# Altium PCB led.PcbDoc
Units mm, origin at the board's own origin, x right, y up, seen from the top; angles counter-clockwise.
Board outline 20 x 20 mm, 2 copper layers (Top Layer, Bottom Layer), stack 1.671 mm thick; 5 components, 4 nets, 10 pads, 1 vias.
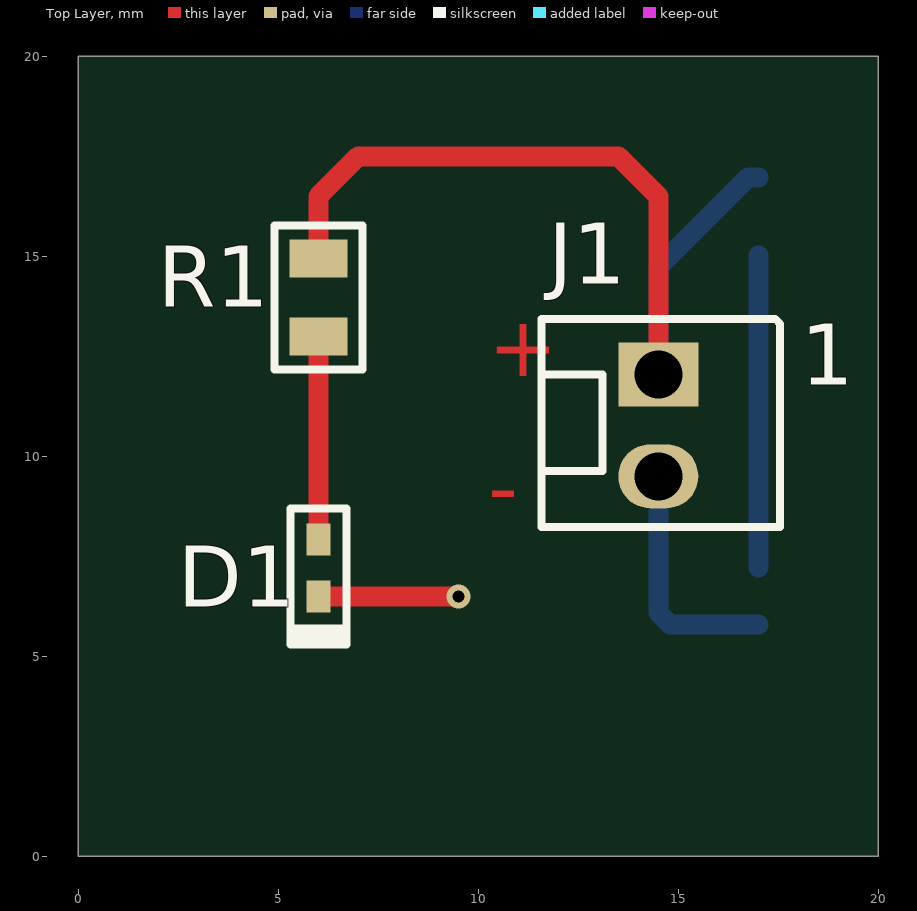
[diagram p0: Top Layer view]
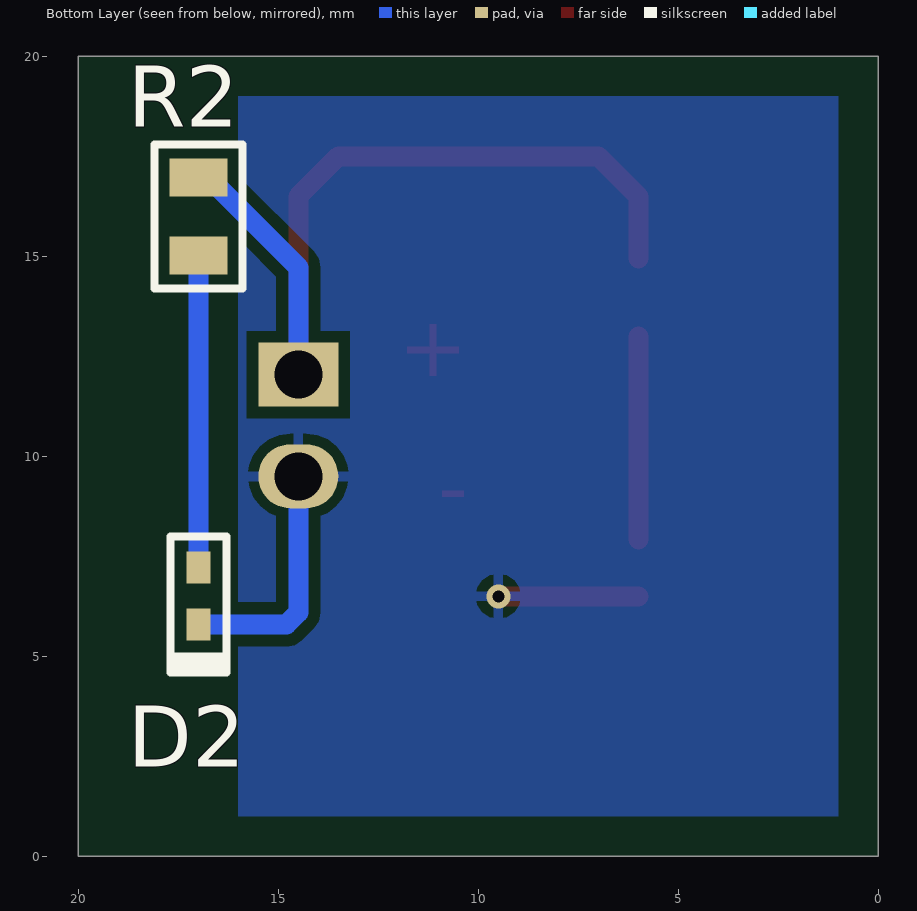
[diagram p1: Bottom Layer view, seen from below]
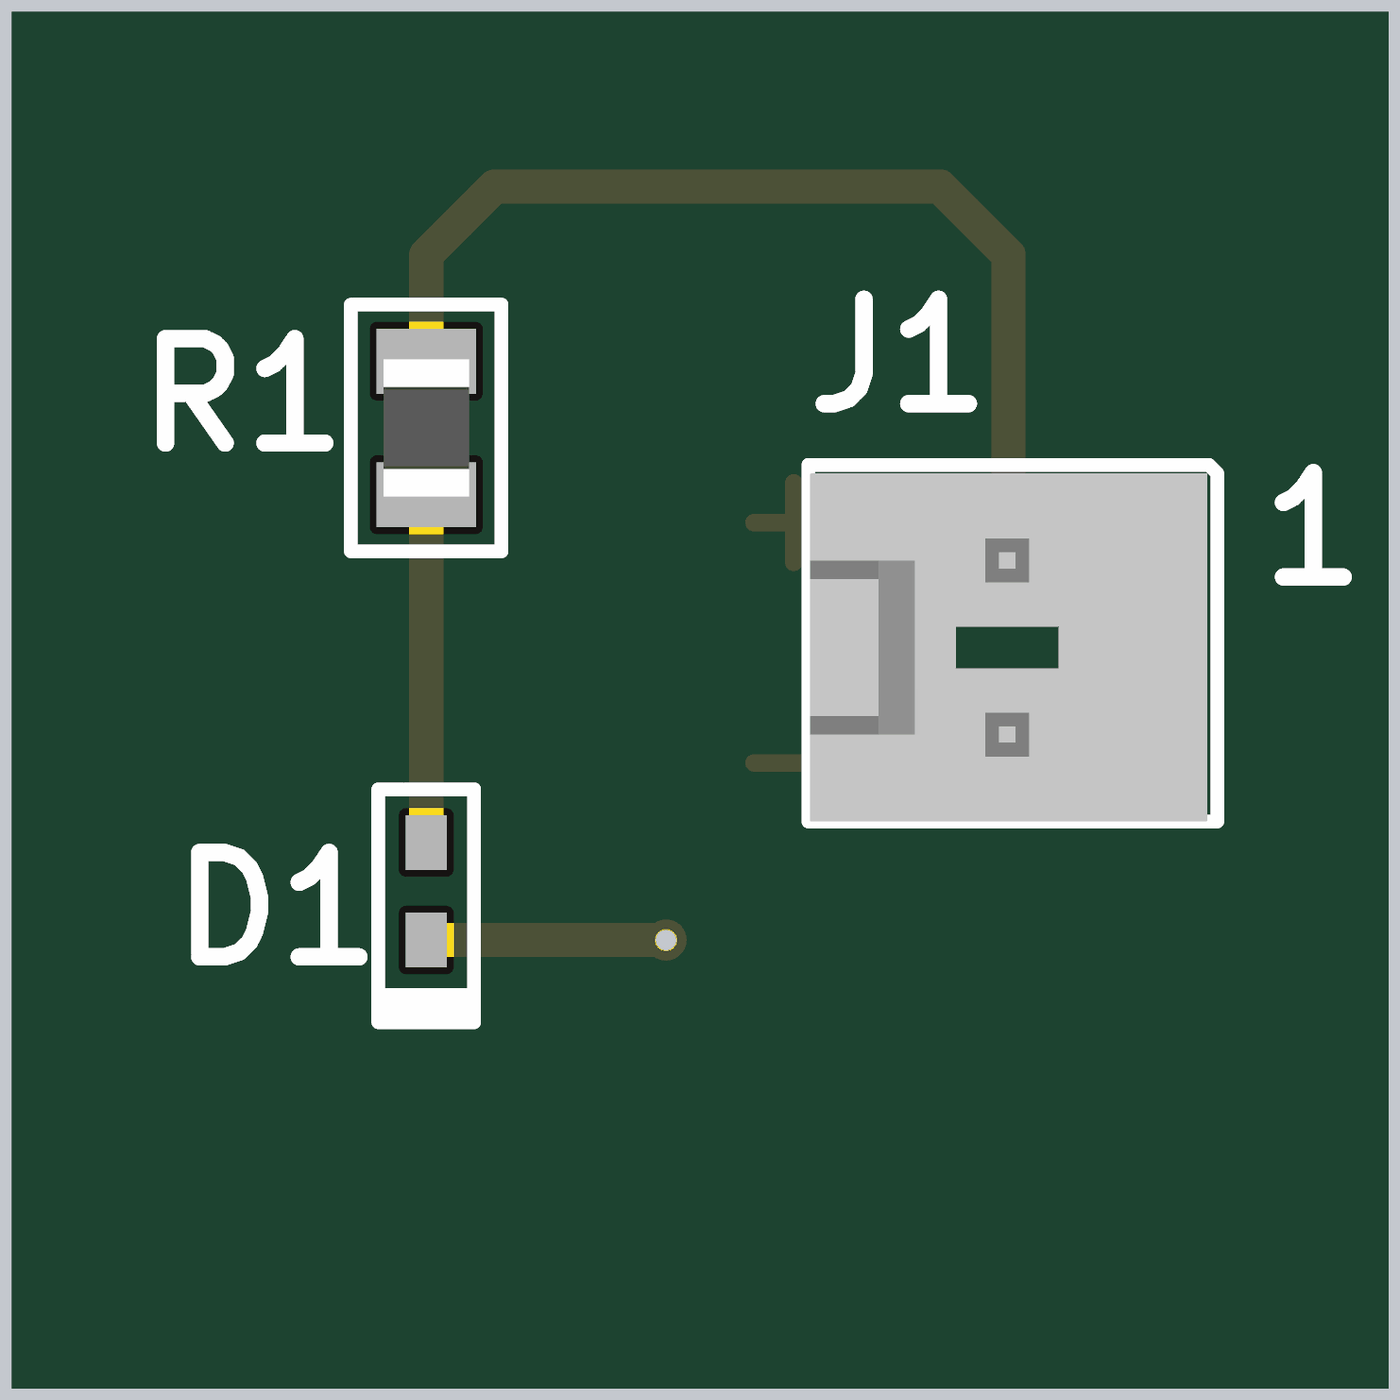
[diagram p2: 3D render of the assembled board from above, using the file's embedded part models]

## Layer stack, top to bottom
Top Solder: solder mask 0.0102, Solder Resist, Dk 3.5
Top Layer: signal copper 0.0356
Dielectric 1: dielectric 1.6, FR-4, Dk 4.8
Bottom Layer: signal copper 0.0356
Bottom Solder: solder mask 0.0102, Solder Resist, Dk 3.5

## Board outline
0,0 20,0 20,20 0,20

## Design rules (kind name [scope] priority, off if disabled: settings)
Clearance [All] p1: gap=0.3 ignorepadtopadclearanceinfootprint=FALSE
PolygonConnect [All] p1: connectstyle=Relief reliefconductorwidth=0.254 reliefentries=4 polygonreliefangle="90 Angle" airgapwidth=0.254
RoutingVias [All] p1: holewidth=0.3 width=0.6 viastyle="Through Hole" minholewidth=0.3 minwidth=0.6 maxholewidth=0.3 maxwidth=0.6
SilkToSolderMaskClearance [IsPad] p1: minsilkscreentomaskgap=0.1 clearancetoexposedcopper=TRUE
SolderMaskExpansion [All] p1: expansion=0.102 istentingtop=FALSE
Width [All] p1: maxlimit=1 minlimit=0.3 preferedwidth=0.5
29 further rules are at their usual default settings.

## Components (designator, comment, footprint, x,y, rotation, side; value= is the part's Value field where it differs from the comment)
D1 "Green" LED0603G 6,7.2 r90 top
D2 "Green" LED0603G 17,6.5 r90 bottom
J1 "1x2 Header" "HEADER 1X2" 14.5,12.04 r0 top
R1 "360R" RESISTOR 6,13.975 r90 top
R2 "360R" RESISTOR 17,16 r90 bottom

## Footprints (in the part's own frame and the unit in brackets; to place one, negate y for a bottom-side part, rotate by r counter-clockwise, add the part's x,y. Pads: shape width x height; smd on the part's side, far side on the other; paste and mask are expansions set on the pad)
"HEADER 1X2" [mm]
  rect 2x1.6 hole 1.2: 1(0,0)
  oval 2x1.6 hole 1.2: 2(0,-2.54)
  silkscreen extent -2.92,-3.81 3.05,1.4, body extent -2.9,-3.81 2.9,1.27, height 11.71
LED0603G [mm]
  rect 0.8x0.6 smd: 1(-0.7,0) 2(0.725,0)
  silkscreen extent -1.9,-0.7 1.5,0.7, body extent -0.81,-0.4 0.81,0.4, height 1.11
RESISTOR [mm]
  rect 0.95x1.45 smd: 1(-0.975,0) 2(0.975,0)
  silkscreen extent -1.8,-1.1 1.8,1.1, body extent -1,-0.62 1,0.62, height 0.61

## Part data
D1 D2: library part TLMG1100-GS08, "Standard LEDs - SMD Green Non-Diffused", Case Code (Imperial)=0603, Case Code (Metric)=1608, Forward Current=20mA, Forward Voltage=2.1V, Manufacturer="Vishay Semiconductors", Max Operating Temperature=100°C, Max Power Dissipation=90mW, Min Operating Temperature=-40°C, Package Quantity=1, Reverse Voltage=6V, Supplier Part Number 1=751-1165-1-ND, Voltage Rating (DC)=3V, Case/Package=0603, Category=Optoelectronics, Color=Green, ComponentLink1Description=https://datasheet.ciiva.com/11773/0900766b80ed1fab-11773829.pdf?src-supplier=RSComponents, ComponentLink1URL=https://datasheet.ciiva.com/11773/0900766b80ed1fab-11773829.pdf?src-supplier=RSComponents, ComponentLink2Description=https://datasheet.ciiva.com/15118/getdatasheetpartid-196748-15118054.pdf?src-supplier=Verical, ComponentLink2URL=https://datasheet.ciiva.com/15118/getdatasheetpartid-196748-15118054.pdf?src-supplier=Verical, ComponentLink3Description=https://datasheet.ciiva.com/2109/tlmb1100-2109920.pdf?src-supplier=Digi-Key, ComponentLink3URL=https://datasheet.ciiva.com/2109/tlmb1100-2109920.pdf?src-supplier=Digi-Key, ComponentLink4Description=https://datasheet.ciiva.com/16299/tlmb1100-16299239.pdf?src-supplier=Future+Electronics, ComponentLink4URL=https://datasheet.ciiva.com/16299/tlmb1100-16299239.pdf?src-supplier=Future+Electronics, ComponentLink5Description=https://datasheet.ciiva.com/2109/tlmb1100-2109919.pdf?src-supplier=Digi-Key, ComponentLink5URL=https://datasheet.ciiva.com/2109/tlmb1100-2109919.pdf?src-supplier=Digi-Key, ComponentLink6Description=https://datasheet.ciiva.com/5798/485053-5798326.pdf?src-supplier=Farnell, ComponentLink6URL=https://datasheet.ciiva.com/5798/485053-5798326.pdf?src-supplier=Farnell, ComponentLink7Description=https://datasheet.ciiva.com/3166/tlmb1100-3166935.pdf?src-supplier=Avnet, ComponentLink7URL=https://datasheet.ciiva.com/3166/tlmb1100-3166935.pdf?src-supplier=Avnet, ComponentLink8Description=https://datasheet.ciiva.com/3166/tlmb1100-3166505.pdf?src-supplier=Avnet, ComponentLink8URL=https://datasheet.ciiva.com/3166/tlmb1100-3166505.pdf?src-supplier=Avnet, ComponentLink9Description=https://datasheet.ciiva.com/22655/1911389-22655641.pdf?src-supplier=Element14, ComponentLink9URL=https://datasheet.ciiva.com/22655/1911389-22655641.pdf?src-supplier=Element14, ComponentLink10Description=https://datasheet.ciiva.com/2109/tlmb1100-2109921.pdf?src-supplier=Digi-Key, ComponentLink10URL=https://datasheet.ciiva.com/2109/tlmb1100-2109921.pdf?src-supplier=Digi-Key, ComponentLink11Description=https://datasheet.ciiva.com/22655/1911389-22655622.pdf?src-supplier=Element14, ComponentLink11URL=https://datasheet.ciiva.com/22655/1911389-22655622.pdf?src-supplier=Element14, ComponentLink12Description=https://datasheet.ciiva.com/5798/tlmb1100-5798250.pdf?src-supplier=Farnell, ComponentLink12URL=https://datasheet.ciiva.com/5798/tlmb1100-5798250.pdf?src-supplier=Farnell, ComponentLink13Description=https://datasheet.ciiva.com/8027/485053-8027918.pdf?src-supplier=Element14, ComponentLink13URL=https://datasheet.ciiva.com/8027/485053-8027918.pdf?src-supplier=Element14, Contact Plating=Gold, Depth=0.8mm, Dominant Wavelength=570nm, Height=0.65mm, Illumination Color=Green, Lead Free="Lead Free", Length=1.6mm, Lens Style=Rectangular,Diffused, Luminous Intensity=35mcd, Manufacturer Part Number=TLMG1100-GS08, Mount="Surface Mount,PCB", Number of Elements=1, Number of LEDs=1, Number of Pins=2, Packaging="Tape and Reel", Power Dissipation=90mW, Power Rating=90mW, Pricing 1="1=0,47000, 10=0,33900, 100=0,22110, 500=0,15894, 1000=0,12438 (USD)", Radiation Hardening=No, REACH SVHC=Unknown, RoHS=Yes, Stock 1=62041, Supplier 1=Digi-Key, Test Current=20mA, Viewing Angle=160°, Wavelength=570nm, Width=0.8mm
J1: library part 22-29-2021, "Conn Wire to Board HDR 2 POS 2.54mm Solder ST Thru-Hole Bag", Color=White, Flammability Rating="UL94 V-0", Insulation Color=Natural, Manufacturer=Molex, Max Operating Temperature=80°C, Supplier Part Number 1=WM2744-ND, Voltage Rating (DC)=250V, Category=Connectors, ComponentLink1Description=https://datasheet.ciiva.com/70131/022292021-sd-70131706.pdf?src-supplier=Digi-Key, ComponentLink1URL=https://datasheet.ciiva.com/70131/022292021-sd-70131706.pdf?src-supplier=Digi-Key, Connector Type="Header,Male Pin", Contact Material=Brass, Contact Mating Length=0.295inch, Contact Plating=Gold, Contact Post Length=0.14inch, Contact Shape=Square, Fastening Type=Friction, Gender=Male, Glow Wire Compliant=Non-compliant, Halogen Free="Low Halogen", Insulation Height=0.461inch, Insulation Material=Nylon, Lead Free="Lead Free", Manufacturer Part Number=22-29-2021, Mount="Through Hole", Number of Positions=2, Number of Rows=1, Packaging=Bag, Pricing 1="1=0,48000, 10=0,45200, 100=0,31630, 500=0,27112, 1000=0,22593, 5000=0,19365, 10000=0,18074 (USD)", RoHS=Yes, Stock 1=6727, Supplier 1=Digi-Key, Termination=Solder
R1 R2: library part CRCW0805360RFKEA, "Res Thick Film 0805 360 Ohm 1% 0.125W(1/8W) ±100ppm/C Molded SMD Automotive Paper T/R", Case Code (Imperial)=0805, Case Code (Metric)=2012, Manufacturer=Vishay, Max Operating Temperature=155°C, Max Power Dissipation=125mW, Min Operating Temperature=-55°C, Package Quantity=10, Supplier Part Number 1=541-360CCT-ND, Temperature Coefficient=100ppm/°C, Tolerance=1%, Voltage Rating=150V, Case/Package=0805, Category=Resistances, ComponentLink1Description=https://datasheet.ciiva.com/2467/dcrcwe3-2467773.pdf?src-supplier=Digi-Key, ComponentLink1URL=https://datasheet.ciiva.com/2467/dcrcwe3-2467773.pdf?src-supplier=Digi-Key, Composition="Thick Film", Contact Plating=Tin, Depth=1.25mm, Features="Automotive AEC-Q200", Height=0.45mm, Lead Free="Lead Free", Length=2mm, Manufacturer Part Number=CRCW0805360RFKEA, Military Standard=Not, Number of Pins=2, Number of Terminals=2, Number of Terminations=2, Packaging="Tape and Reel", Power Rating=125mW, Pricing 1="1=0,10000, 10=0,06200, 100=0,02540, 1000=0,01142, 2500=0,00991 (USD)", Radiation Hardening=No, REACH SVHC=Unknown, Resistance=360R, RoHS=Yes, Stock 1=14278, Supplier 1=Digi-Key, Termination=SMD/SMT, Voltage Rating (DC)=150V, Weight=0.000194oz, Width=0.049inch

## Via types
v1: diameter 0.6, hole 0.3, Top Layer to Bottom Layer, tented both sides, 1 vias

## Nets (pads, with @x,y where several pads share a name; then routed paths per layer and width w, separated by ;. In a path a pad name is that pad's centre, name@x,y a point inside that pad or via, vN(x,y) a via of type N, cw(c..) or ccw(c..) an arc to the next point about the centre after c; other vN are vias at no path point)
3V3: J1.1 R1.2 R2.2 | length 21.5
  Top Layer w0.5: R1.2 6,16.5 7,17.5 13.5,17.5 14.5,16.5 J1.1
  Bottom Layer w0.5: J1.1 14.5,14.725 16.75,16.975 R2.2
Diode1: D1.2 R1.1 | length 5.1
  Top Layer w0.5: D1.2 R1.1
Diode2: D2.2 R2.1 | length 7.8
  Bottom Layer w0.5: D2.2 R2.1
GND: D1.1 D2.1 J1.2 | length 9.5
  Top Layer w0.5: D1.1 v1(9.5,6.5)
  Bottom Layer w0.5: J1.2 14.5,6.093 14.793,5.8 D2.1

## Polygon pours and split planes (outlines as drawn)
GND on Bottom Layer "GND_L02_P000" (solid, pour order 0): 16,1 16,19 1,19 1,1

## Other copper
Top Layer:
  text "+" at 10.254,12 h1.52
  text "-" at 10.254,8.492 h1.52

## Silkscreen, mask and mechanical layers (free items; w line width, h text height)
Board:
  the board outline again, w0.1

## Text inside footprints (layer, text, board x,y; h text height)
J1: Top Overlay "1" at 18.056,11.786 h1.52